# EAGLE board Dynamatic NO 15 -530 - 2 (EAGLE 6.1)
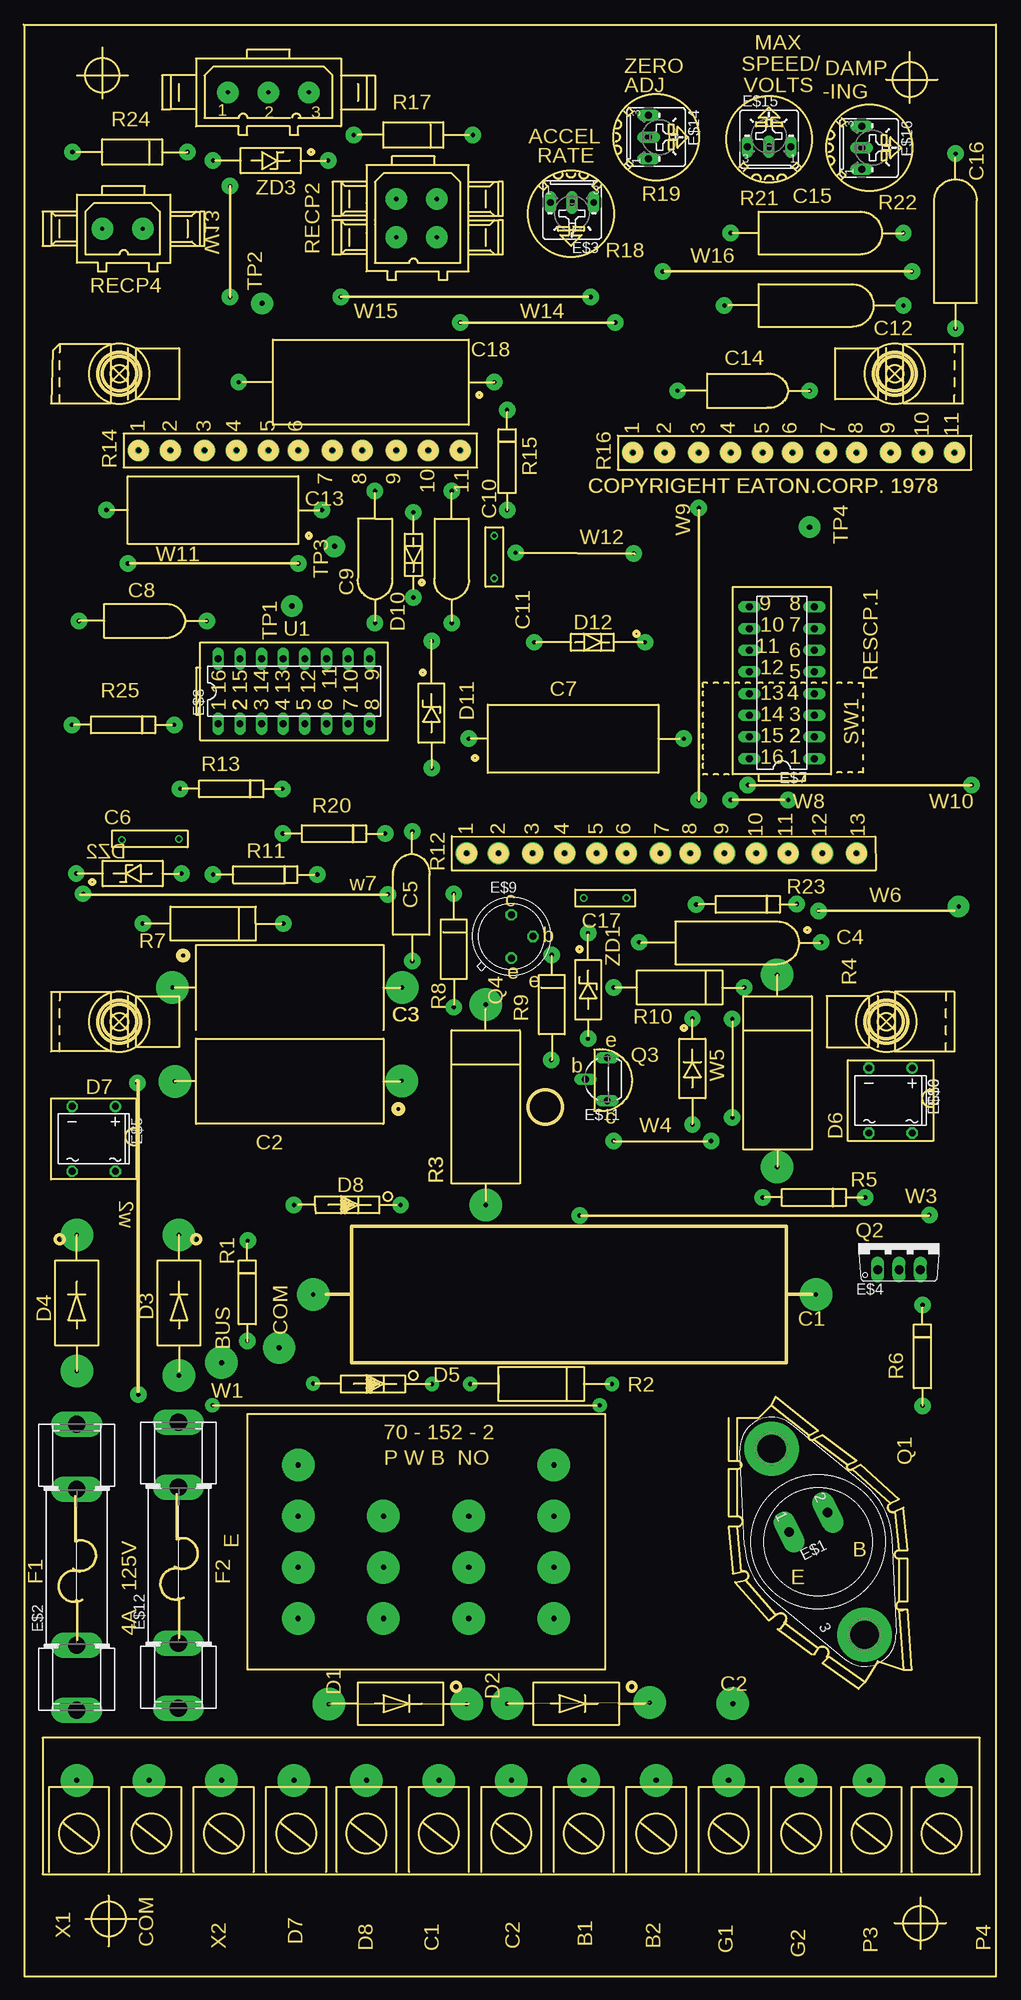
[diagram p0: board, top side]
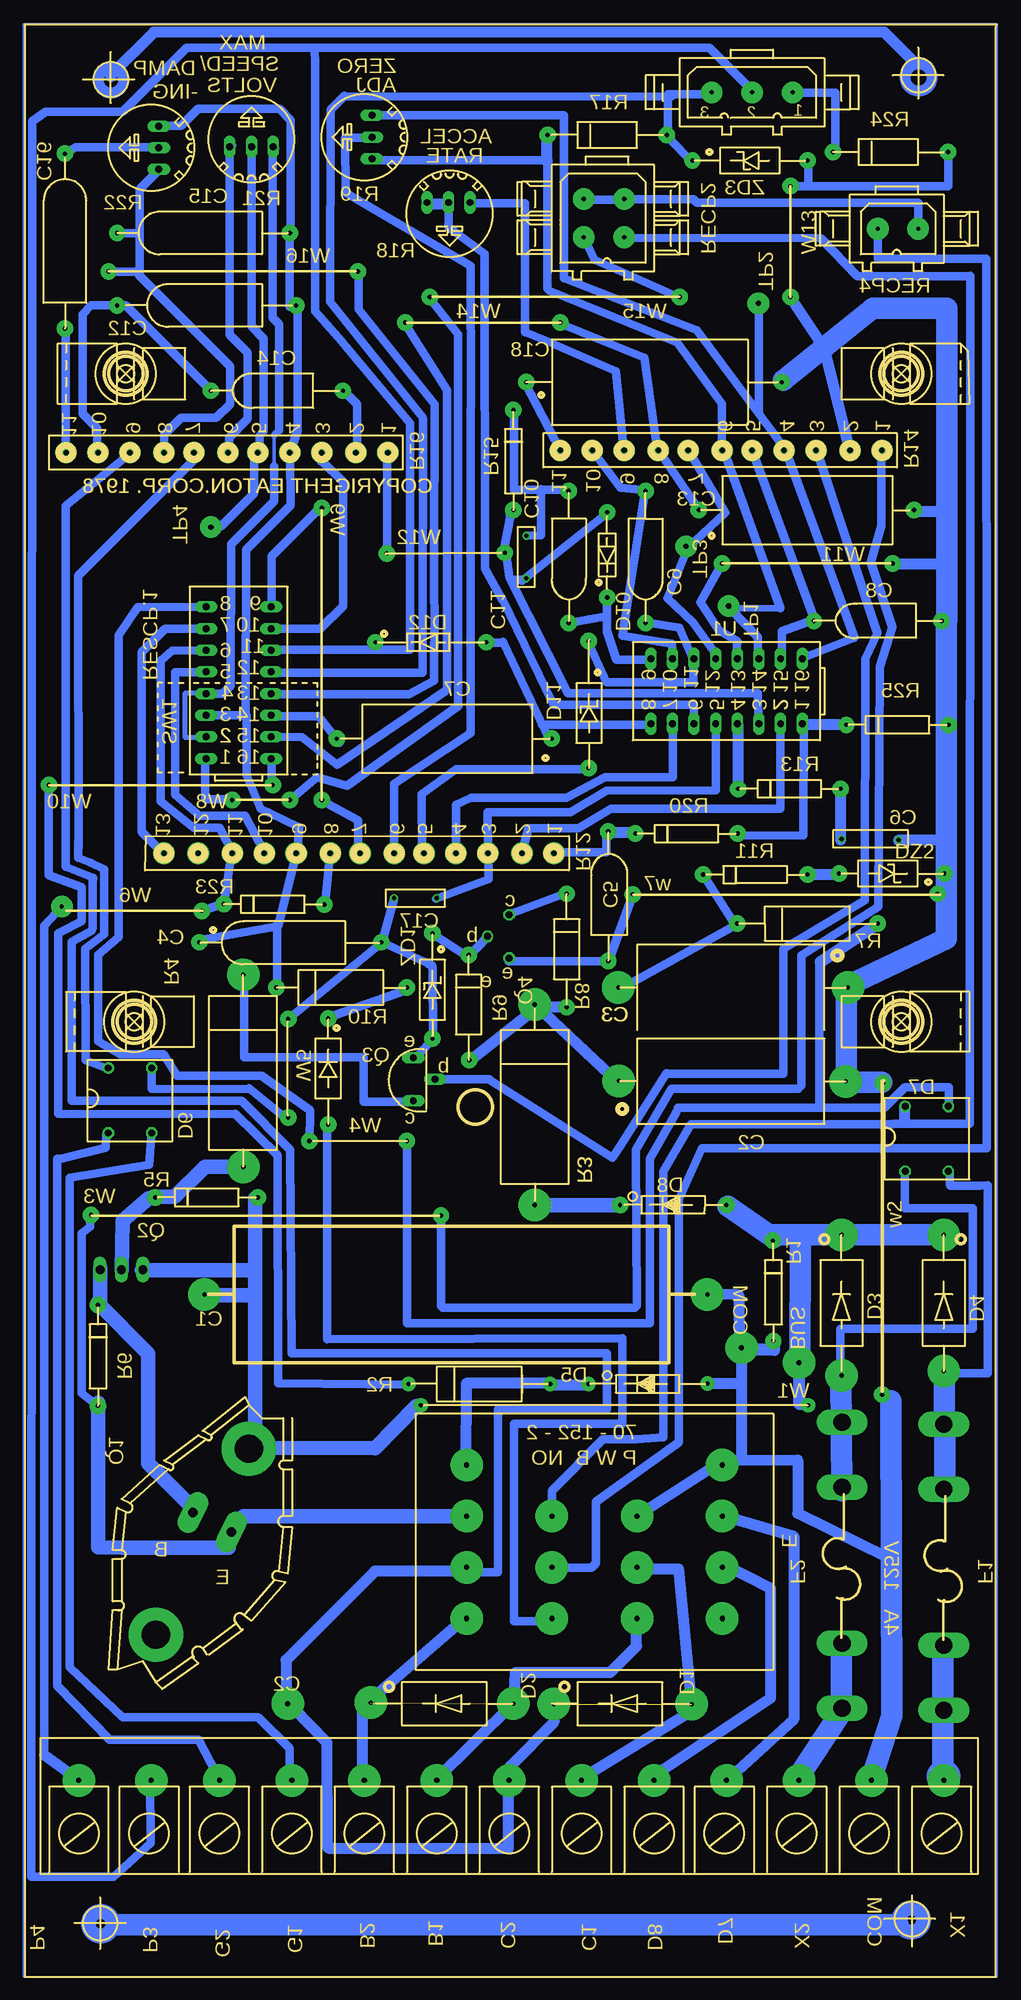
[diagram p1: board, bottom side, seen from below]

Size 114.12 x 228.94 mm. Coordinates in mm from the lower left corner, seen from the top.
Outline: 1178 segments
Outline: circle at 6.5,16.75 radius 2.3
Outline: circle at 15,16.75 radius 2.3
Outline: circle at 23.5,16.75 radius 2.3
Outline: circle at 32,16.75 radius 2.3
Outline: circle at 40.25,16.75 radius 2.3
Outline: circle at 48.75,16.75 radius 2.3
Outline: circle at 57.25,16.75 radius 2.3
Outline: circle at 65.75,16.75 radius 2.3
Outline: circle at 74.25,16.75 radius 2.3
Outline: circle at 82.75,16.75 radius 2.3
Outline: circle at 91.25,16.75 radius 2.3
Outline: circle at 99.5,16.75 radius 2.3
Outline: circle at 107.75,16.75 radius 2.3
Outline: circle at 10,6.75 radius 2
Outline: circle at 105.25,6.25 radius 2
Outline: circle at 104,222.5 radius 2
Outline: circle at 9.25,223 radius 2
Outline: circle at 11.25,188 radius 2
Outline: circle at 102.25,188 radius 2
Outline: circle at 101.25,112 radius 2
Copper layers (1*16): Top 0.035mm / dielectric 1.5mm / Bottom 0.035mm
Design rules: minimum track width 10mil, minimum drill 24mil, track to track 8mil, track to pad 8mil, pad to pad 8mil, via to via 8mil, smd to smd 8mil, copper to edge 40mil, drill to drill 8mil, minimum pad ring 10mil, minimum via ring 8mil, stop-mask expansion 4mil, vias tented up to drill 0mil, thermal gap 10mil

## Footprints (pad centres in the part's own frame; a part is rotated, then mirrored left to right if it is on the bottom)
TO66 = drill 1.118 pad 2.54 long: 1 -2.54,-2.54; 2 -2.54,2.54 | drill 3.302 pad 6.35: 3 12.192,0; TO66 -12.192,0
SH32 = drill 2.007 long: 1A -16.764,0; 1B -9.144,0; 2A 9.144,0; 2B 16.764,0
B25U = drill 0.813 long: A 2.54,-0.889; E -2.54,-0.889; S 0,-0.889
T-30_V = drill 1.016 long: 1 -2.5,-3.1; 2 0,-3.1; 3 2.5,-3.1
DB = drill 0.813: + -2.54,-3.81 | drill 0.813 octagon: - 2.54,-3.81; AC1 2.54,3.81; AC2 -2.54,3.81
DIL16 = drill 0.813 long: 1 -8.89,-3.81; 2 -6.35,-3.81; 3 -3.81,-3.81; 4 -1.27,-3.81; 5 1.27,-3.81; 6 3.81,-3.81; 7 6.35,-3.81; 8 8.89,-3.81; 9 8.89,3.81; 10 6.35,3.81; 11 3.81,3.81; 12 1.27,3.81; 13 -1.27,3.81; 14 -3.81,3.81; 15 -6.35,3.81; 16 -8.89,3.81
TO5 = drill 0.813 octagon: 1 0,-2.54; 2 2.54,0; 3 0,2.54
TO92L = drill 0.813 long: 1 0,-2.54; 2 2.54,0; 3 0,2.54

## Placement (x,y rotation side)
E$1  [TO66]  93.25,51 296.6 top
E$2  [SH32]  6.25,48 90 top
E$3  [B25U]  64.38,207.19 180 top
E$4  [T-30_V]  102.75,86 0 top
E$5  [DB]  8.25,98.25 180 top
E$6  [DB]  101.75,102.75 180 top
E$7  [DIL16]  89,151.75 90 top
E$8  [DIL16]  31.75,150.75 0 top
E$9  [TO5]  57.25,122 0 top
E$10  [DB]  101.75,102.75 180 top
E$11  [TO92L]  68.5,105.25 180 top
E$12  [SH32]  18.19,48.25 90 top
E$14  [B25U]  74.25,215.75 270 top
E$15  [B25U]  87.5,215.5 0 top
E$16  [B25U]  99.25,214.5 270 top

## Library data of the parts
E$1 = transistor-fet
E$2 E$12 = fuse
E$3 E$14-E$16 = pot
E$4 E$9 E$11 = transistor
E$5 E$6 E$10 = rectifier
E$7 E$8 = 45xx

## Tracks (layer width: path | path; a pad name or v marks a point on that pad's centre or on a via)
S$1
  Bottom 0.254: 0,0 0,229 114.25,229 114.25,0 0,0
S$2  (via drill 0.6 pad 3.81)
  other vias: 62.25,54
S$3  (via drill 0.6 pad 3.81)
  other vias: 23.25,23
S$4  (via drill 0.6 pad 3.81)
  other vias: 14.75,23
S$5  (via drill 0.6 pad 3.81)
  other vias: 31.75,23
S$6  (via drill 0.6 pad 3.81)
  other vias: 40.25,23
S$7  (via drill 0.6 pad 3.81)
  other vias: 48.75,23
S$8  (via drill 0.6 pad 3.81)
  other vias: 57.25,23
S$9  (via drill 0.6 pad 3.81)
  other vias: 65.75,23
S$10  (via drill 0.6 pad 3.81)
  other vias: 74.25,23
S$11  (via drill 0.6 pad 3.81)
  other vias: 82.75,23
S$12  (via drill 0.6 pad 3.81)
  other vias: 91.25,23
S$13  (via drill 0.6 pad 3.81)
  other vias: 99.25,23
S$14  (via drill 0.6 pad 3.81)
  other vias: 107.75,23
S$15  (via drill 0.6 pad 3.81)
  other vias: 83.25,32
S$16  (via drill 0.6 pad 2.54)
  other vias: 52,131.75
S$17  (via drill 0.6 pad 3.81)
  other vias: 23.25,72
S$18  (via drill 0.6 pad 2.54)
  other vias: 92.25,170
S$19  (via drill 0.6 pad 2.54)
  other vias: 13.5,179
S$20  (via drill 0.6 pad 2.54)
  Bottom 1.27: v17.25,179 20.25,191
S$21  (via drill 0.6 pad 2.54)
  other vias: 21.25,179
S$22  (via drill 0.6 pad 2.54)
  other vias: 25,179
S$23  (via drill 0.6 pad 2.54)
  other vias: 28.75,179
S$24  (via drill 0.6 pad 2.54)
  other vias: 32.25,179
S$25  (via drill 0.6 pad 2.54)
  other vias: 36.25,179
S$26  (via drill 0.6 pad 2.54)
  other vias: 39.75,179
S$27  (via drill 0.6 pad 2.54)
  other vias: 43.75,179
S$28  (via drill 0.6 pad 2.54)
  other vias: 47.5,179
S$29  (via drill 0.6 pad 2.54)
  other vias: 51.25,179
S$30  (via drill 0.6 pad 2.54)
  other vias: 71.5,178.75
S$31  (via drill 0.6 pad 2.54)
  other vias: 75.25,178.75
S$32  (via drill 0.6 pad 2.54)
  other vias: 79.25,178.75
S$33  (via drill 0.6 pad 2.54)
  other vias: 83,178.75
S$34  (via drill 0.6 pad 2.54)
  other vias: 86.75,178.75
S$35  (via drill 0.6 pad 2.54)
  other vias: 90.25,178.75
S$36  (via drill 0.6 pad 2.54)
  Bottom 1.016: v94.25,178.75 94.25,177.88 107.81,164.31 107.75,132.38
S$37  (via drill 0.6 pad 2.54)
  other vias: 97.75,178.75
S$38  (via drill 0.6 pad 2.54)
  other vias: 101.75,178.75
S$39  (via drill 0.6 pad 2.54)
  other vias: 105.5,178.75
S$40  (via drill 0.6 pad 2.54)
  other vias: 109.25,178.75
S$41  (via drill 0.6 pad 2.54)
  other vias: 36.5,167.75
S$42  (via drill 0.6 pad 3.81)
  other vias: 6.25,23
S$43  (via drill 0.6 pad 3.81)
  other vias: 32.25,54
S$44  (via drill 0.6 pad 3.81)
  other vias: 42.25,42
S$45  (via drill 0.6 pad 3.81)
  other vias: 52.25,42
S$46  (via drill 0.6 pad 3.81)
  other vias: 62.25,42
S$47  (via drill 0.6 pad 3.81)
  other vias: 62.25,48
S$48  (via drill 0.6 pad 3.81)
  other vias: 62.25,60
S$49  (via drill 0.6 pad 3.81)
  other vias: 52.25,54
S$50  (via drill 0.6 pad 3.81)
  other vias: 52.25,48
S$51  (via drill 0.6 pad 3.81)
  other vias: 42.25,54
S$52  (via drill 0.6 pad 3.81)
  other vias: 42.25,48
S$53  (via drill 0.6 pad 3.81)
  other vias: 32.25,42
S$54  (via drill 0.6 pad 3.81)
  other vias: 32.25,48
S$55  (via drill 0.6 pad 3.81)
  other vias: 32.25,60
S$56  (via drill 0.6 pad 2.54)
  other vias: 55.75,131.75
S$57  (via drill 0.6 pad 2.54)
  other vias: 59.75,131.75
S$58  (via drill 0.6 pad 2.54)
  other vias: 31.5,160.75
S$59  (via drill 0.6 pad 2.54)
  other vias: 63.5,131.75
S$60  (via drill 0.6 pad 2.54)
  other vias: 67.25,131.75
S$61  (via drill 0.6 pad 2.54)
  other vias: 70.75,131.75
S$62  (via drill 0.6 pad 2.54)
  other vias: 74.75,131.75
S$63  (via drill 0.6 pad 2.54)
  Bottom 1.016: v78.25,131.75 78.94,125.25
S$64  (via drill 0.6 pad 2.54)
  other vias: 82.25,131.75
S$65  (via drill 0.6 pad 2.54)
  other vias: 86,131.75
S$66  (via drill 0.6 pad 2.54)
  other vias: 89.75,131.75
S$67  (via drill 0.6 pad 2.54)
  other vias: 93.75,131.75
S$68  (via drill 0.6 pad 2.54)
  other vias: 97.75,131.75
S$69  (via drill 0.5 pad 2.54)
  Bottom 1.016: v109.75,125.5 111.81,123.25 111.81,26
  Bottom 1.27: 111.81,26 108,23.25 108,22.75
S$70
  Bottom 1.27: 9.75,224.56 13.25,228.06 98.94,228.06 104,223 104,222.88
S$71  (via drill 0.5)
  other vias: 65.75,126.5
S$72  (via drill 0.5)
  other vias: 70.75,126.5
S$73  (via drill 0.6 pad 3.81)
  other vias: 30,73.75
S$74  (via drill 0.5)
  other vias: 55.25,164
S$75  (via drill 0.5)
  other vias: 11.56,133.31
S$76  (via drill 0.5)
  other vias: 18.25,133.44
S$77  (via drill 0.5)
  other vias: 55.25,169
S$78
  Bottom 1.016: 107.37,218.75 111.62,218.75 113.25,217.62 113.31,15.31 113.31,11.69 103.69,11.69 99.31,15.62 99.37,23.5
S$79
  Bottom 1.016: 109.37,213.88 108.12,214.56 97.81,214.56
S$80
  Bottom 1.016: 98.31,211.94 100.56,209.69
S$81  (via drill 0.5 pad 2.54)
  other vias: 24,221
S$82  (via drill 0.5 pad 2.54)
  other vias: 28.75,221
S$83  (via drill 0.5 pad 2.54)
  other vias: 33.5,221
S$84  (via drill 0.5 pad 2.54)
  other vias: 9.25,205
S$85  (via drill 0.5 pad 2.54)
  other vias: 14,205
S$86
  Bottom 1.016: 103.44,204.5 100.62,204.5
S$87
  Bottom 1.016: 104.44,199.94 100.62,199.94
S$88
  Bottom 1.016: 100.62,200.12 100.62,209.5
S$89
  Bottom 1.016: 109.31,178.75 109.31,193.19
S$90
  Bottom 1.016: 92.31,186.06 102.25,196 106.31,196 107.31,195 107.31,183.31 105.62,181.62 105.62,178.19
S$91
  Bottom 1.016: 100.75,199.62 90,188.88 90,184.44 91.62,182.81 95.75,182.81 97.75,180.81 97.75,178.69
S$92
  Bottom 1.016: 3.12,199.5 3.19,100 12.19,100 12.25,99.94 35.94,99.94 39.12,94.44 39.12,63.25 42.25,63 46.25,63 52.25,57 52.25,54.06 52.19,54
S$93  (via drill 0.5 pad 2.54)
  other vias: 48.5,204
S$94  (via drill 0.5 pad 2.54)
  other vias: 43.75,208.5
S$95  (via drill 0.5 pad 2.54)
  other vias: 48.5,208.5
S$96  (via drill 0.5 pad 1.68)
  other vias: 52.44,69.5
S$97  (via drill 0.5 pad 1.68)
  other vias: 47.94,69.5
S$98  (via drill 0.5 pad 1.68)
  other vias: 22.19,67
S$99  (via drill 0.5 pad 1.68)
  other vias: 69.06,69.5
S$100  (via drill 0.5 pad 3.81)  (1 unrouted)
  other vias: 52,31.94 35.81,31.94
S$101  (via drill 0.5 pad 3.81)  (1 unrouted)
  other vias: 73.5,32.12 56.75,32
S$102  (via drill 0.5 pad 3.81)
  other vias: 6.25,87
S$103  (via drill 0.5 pad 3.81)
  other vias: 6.25,71
S$104  (via drill 0.5 pad 1.93)
  other vias: 31.75,90.5
S$105  (via drill 0.5 pad 1.93)
  other vias: 44.25,90.5
S$106  (via drill 0.5 pad 3.81)
  other vias: 54.25,90.5
S$107  (via drill 0.5 pad 1.93)
  other vias: 65.25,89.25
S$108  (via drill 0.5 pad 1.93)
  other vias: 106.31,89.31
S$109  (via drill 0.5 pad 3.81)
  other vias: 93,80
S$110  (via drill 0.5 pad 3.81)
  other vias: 34,80
S$111  (via drill 0.5 pad 1.93)
  other vias: 26.31,86.31
S$112  (via drill 0.5 pad 1.93)
  other vias: 26.25,74.56
S$113  (via drill 0.5 pad 1.93)
  other vias: 105.5,78.75
S$114  (via drill 0.5 pad 1.93)
  other vias: 105.5,66.94
S$115  (via drill 0.5 pad 1.93)
  other vias: 98.75,91.38
S$116  (via drill 0.5 pad 1.93)
  other vias: 86.75,91.38
S$117  (via drill 0.5 pad 3.81)
  other vias: 88.44,94.94
S$118  (via drill 0.5 pad 1.93)
  other vias: 78.5,99.94
S$119  (via drill 0.5 pad 1.93)
  other vias: 80.69,98
S$120  (via drill 0.5 pad 1.93)
  Bottom 1.016: v69.25,98 69.25,76.62 40.75,76.62 40.75,95.94 37.62,101.38 37.69,101.38
S$121  (via drill 0.5 pad 1.93)
  other vias: 83.19,112.31
S$122  (via drill 0.5 pad 1.93, 0.5 pad 3.81)
  other vias: 44.38,105.06 13.38,104.81 13.5,68.25
S$123  (via drill 0.5 pad 3.81)
  other vias: 44.44,116
S$124  (via drill 0.5 pad 3.81)
  other vias: 17.5,116
S$125  (via drill 0.5 pad 3.81)
  other vias: 17.75,105
S$126  (via drill 0.5 pad 3.81)
  other vias: 54.25,114
S$127  (via drill 0.5 pad 1.93)
  other vias: 50.5,113.69
S$128  (via drill 0.5 pad 1.93)
  other vias: 78.5,112.38
S$129  (via drill 0.5 pad 1.93)
  other vias: 61.94,107.5
S$130  (via drill 0.5 pad 1.93)
  other vias: 62,119.81
S$131
  Bottom 1.016: 70.75,126.44 72.25,121.06
S$132  (via drill 0.5 pad 1.93)
  other vias: 72.25,121.31
S$133  (via drill 0.5 pad 1.93)
  other vias: 69.25,116
S$134  (via drill 0.5 pad 1.93)
  other vias: 84.56,116
S$135  (via drill 0.5 pad 3.81)
  other vias: 88.44,117.5
S$136  (via drill 0.5 pad 1.93)
  other vias: 93.62,121.31
S$137
  Bottom 1.016: 90.06,214.75 90.06,192.56 87.94,190.44 87.94,182.69 90.12,180.5 90.12,178.44
  Bottom 1.27: 89.94,214.75 90.06,214.75
S$138  (via drill 0.5 pad 1.93)
  other vias: 93.31,125
S$139  (via drill 0.5 pad 1.93)
  other vias: 90.75,125.81
S$140  (via drill 0.5 pad 1.93)
  other vias: 78.94,125.75
S$141  (via drill 0.5 pad 1.93)
  other vias: 45.62,119.12
S$142  (via drill 0.5 pad 1.93)
  other vias: 30.5,123.5 42.75,126.94 7,127
S$143  (via drill 0.5 pad 1.93)
  other vias: 14,123.5
S$144  (via drill 0.5 pad 1.93)
  other vias: 50.5,127
S$145  (via drill 0.5 pad 1.93)
  other vias: 45.62,134.31
S$146  (via drill 0.5 pad 1.93)
  other vias: 47.94,141.75
S$147  (via drill 0.5 pad 1.93)
  other vias: 52.25,145.19
S$148  (via drill 0.5 pad 1.93)
  other vias: 77.5,145.19
S$149  (via drill 0.5 pad 1.93)
  other vias: 79.25,138
S$150  (via drill 0.5 pad 1.93)
  other vias: 83,138
S$151  (via drill 0.5 pad 1.93)
  other vias: 89.75,138
S$152  (via drill 0.5 pad 1.93)
  other vias: 85,139.75
S$153  (via drill 0.5 pad 1.93)
  other vias: 111.25,139.75
S$154  (via drill 0.5 pad 1.93)
  other vias: 79.25,172.25
S$155  (via drill 0.5 pad 1.93)
  other vias: 47.94,156.62
S$156  (via drill 0.5 pad 1.93)
  other vias: 17.69,146.81
S$157  (via drill 0.5 pad 1.93)
  other vias: 42.44,134.06
S$158  (via drill 0.5 pad 1.93)
  other vias: 21.5,159
S$159  (via drill 0.5 pad 1.93)
  other vias: 6.5,159
S$160  (via drill 0.5 pad 1.93)
  other vias: 41.25,158.75
S$161  (via drill 0.5 pad 1.93)
  other vias: 72.94,156.5
S$162  (via drill 0.5 pad 1.93)
  other vias: 76.75,186
S$163  (via drill 0.5 pad 1.93)
  other vias: 92.25,186
S$164  (via drill 0.5 pad 1.93)
  other vias: 103.25,196
S$165  (via drill 0.5 pad 1.93)
  other vias: 82.25,196
S$166  (via drill 0.5 pad 1.93)
  other vias: 83,204.5
S$167  (via drill 0.5 pad 1.93)
  other vias: 103.25,204.5
S$168  (via drill 0.5 pad 1.93)
  other vias: 109.38,193.31
S$169  (via drill 0.5 pad 1.93)
  other vias: 109.38,213.81
S$170  (via drill 0.5 pad 1.93)
  other vias: 104.25,200
S$171  (via drill 0.5 pad 1.93)
  other vias: 75,200
S$172  (via drill 0.5 pad 1.93)
  other vias: 66.56,197
S$173  (via drill 0.5 pad 1.93)
  other vias: 69.44,194
S$174  (via drill 0.5 pad 1.93)
  other vias: 51.25,194
S$175  (via drill 0.5 pad 1.93)
  other vias: 37.25,197
S$176  (via drill 0.5 pad 1.93)
  other vias: 55.25,187
S$177  (via drill 0.5 pad 1.93)
  other vias: 56.75,172
S$178  (via drill 0.5 pad 1.93)
  other vias: 25.25,187 9.75,172 35,172 32.25,165.75 12.25,165.75
S$179  (via drill 0.5 pad 1.93)
  other vias: 35.75,213
S$180  (via drill 0.5 pad 1.93)
  other vias: 22.25,213 24.25,197 24.25,210
S$181  (via drill 0.5 pad 1.93)
  other vias: 19.25,214
S$182  (via drill 0.5 pad 1.93)
  other vias: 5.75,214
S$183  (via drill 0.5 pad 1.93)
  other vias: 52.75,216
S$184  (via drill 0.5 pad 1.93)
  other vias: 38.75,216
S$185
  Bottom 1.016: 87.5,214.62 87.5,193.56 86.06,192.12 86.06,181.25 86.56,180.75 86.56,178.75
  Bottom 1.27: 87.44,214.69 87.5,214.62
S$186
  Bottom 0.406: 84.81,180.81 84.81,177.12 | 84.81,173.12 84.81,173.06
  Bottom 0.813: 84.25,181.38 84.81,180.81
  Bottom 1.016: 85,214.31 85,194.56 84.25,193.81 84.25,181.38 | 84.81,173.06 89.81,168.06 | 84.81,173.12 84.81,177.12
  Bottom 1.27: 84.87,214.44 85,214.31
S$187
  Bottom 0.813: 92.87,150.38 92.81,150.44 | 89.5,168.38 89.87,168
  Bottom 1.016: 92.81,150.44 90.87,150.44 89.94,151.38 89.87,168
S$188
  Bottom 1.016: 87.19,178.56 87.19,174 91.06,170.12 92.69,170.12
  Bottom 1.27: 86.81,178.94 87.19,178.56 | 92.69,170.12 92.69,170
S$189
  Bottom 1.016: 98.31,217.06 95.75,217.06 93.75,219.06 84.19,219.06 82.87,217.75 82.87,204.38
  Bottom 1.27: 98.37,217 98.31,217.06
S$190
  Bottom 1.016: 19,213.94 19,220.94 23.94,220.94
S$191
  Bottom 1.016: 24.19,210 5.75,210 5.75,214.25
S$192
  Bottom 1.016: 22.12,213.06 22.12,210.06
  Bottom 1.27: 22.19,213.06 22.12,213.06
S$193
  Bottom 1.016: 9.25,204.88 9.25,208.06 35.25,208.06 35.62,208.44 43.75,208.44 | 43.81,208.38 48.5,208.38
  Bottom 1.27: 43.75,208.44 43.81,208.38
S$194
  Bottom 1.016: 14,204.88 14,201.5 1.25,201.5 1.19,139.62
S$195
  Bottom 1.27: 10.87,102.12 10.87,100.19
S$196
  Bottom 2.54: 17.69,104.88 17.69,116.12 5.94,121.75 5.94,159.5
S$197
  Bottom 2.54: 5.87,159.06 5.87,195.69 14.56,195.69 25.06,187.25
S$198  (via drill 0.5 pad 1.93)
  other vias: 5.69,146.81
S$199  (via drill 0.5 pad 1.93)
  other vias: 71.62,166.94
S$200  (via drill 0.5 pad 1.93)
  other vias: 57.75,167
S$201  (via drill 0.6 pad 2.54)
  other vias: 28,196.25
S$202  (via drill 0.5 pad 1.93)
  other vias: 66.25,110
S$203  (via drill 0.5 pad 1.93)
  other vias: 34.5,129.25
S$204  (via drill 0.5 pad 1.93)
  other vias: 30.38,139.31
S$205  (via drill 0.5 pad 1.93)
  other vias: 30.44,134.06
S$206  (via drill 0.5 pad 1.93)
  other vias: 22.25,129.25
S$207  (via drill 0.5 pad 1.68)
  other vias: 34,69.56
S$208  (via drill 0.5 pad 3.81)
  other vias: 18.25,87
S$209  (via drill 0.5 pad 3.81)
  other vias: 18.25,70.5
S$210
  Bottom 1.27: 9.75,171.88 5.56,171.88
S$211
  Bottom 1.27: 12.25,165.69 5.75,165.69
S$212
  Bottom 1.016: 28.69,221.19 33.75,226.25 95.12,226.25 102.62,218.75 107.06,218.75
S$213
  Bottom 1.016: 48.44,203.88 47.25,201.38 37.19,196.94
S$214
  Bottom 1.27: 24.12,196.75 20.75,191.62
S$215
  Bottom 1.016: 73.31,218.31 50.81,218.31 50.81,199.19 35.25,193.12 24.56,178.75
S$216
  Bottom 1.016: 27.94,195.75 27.94,183.44
S$217
  Bottom 1.016: 33.37,220.75 38.62,220.75 38.62,215.81 35.69,212.69
S$218
  Bottom 1.016: 38.12,220.56 76.56,220.5
S$219
  Bottom 1.016: 73.25,213.06 52.94,213.06 | 52.75,216 52.75,197.94
  Bottom 1.27: 52.94,213.06 52.94,213 52.81,213 52.81,216 52.75,216
S$220
  Bottom 1.016: 32.31,178.94 32.31,184.5 37.5,191.62 52.5,197.75
  Bottom 1.27: 32.25,178.94 32.31,178.94
S$221
  Bottom 1.016: 51.25,193.88 41.37,189.88 39.87,178.94
S$222
  Bottom 1.016: 39.69,178.94 34.87,171.88
S$223
  Bottom 1.016: 55.37,186.94 51.25,178.94
S$224
  Bottom 1.016: 51.87,191.38 44.75,188.31 43.81,178.81
S$225
  Bottom 1.27: 66.81,207.94 64.5,207.94
S$226
  Bottom 1.016: 61.81,208 55.37,208 55.37,192.88
S$227
  Bottom 1.016: 55.31,192.88 52.06,191.5
S$228
  Bottom 1.016: 64.37,207.19 64.37,205.19 60.12,202.06 60.06,165.12 58.06,161.44
S$229
  Bottom 1.016: 73.44,215.69 76.5,215.69 76.44,209.25 65.31,202.69 61.81,200.69 61.75,185.69 61.81,182.38
S$230
  Bottom 1.016: 76.69,186 75.12,184.44 75.12,178.62
S$231
  Bottom 1.016: 76.56,220.62 78.19,218.94 78.25,196.44 67.44,182.88
S$232  (via drill 0.5 pad 1.93)
  other vias: 41.25,174.25
S$233  (via drill 0.5 pad 1.93)
  other vias: 56.75,183.75
S$234  (via drill 0.5 pad 1.93)
  other vias: 50.25,158.75 45.75,161.75 45.75,171.75
S$235  (via drill 0.5 pad 1.68)
  other vias: 67.62,67
S$236
  Bottom 1.016: 79.19,137.94 75,135.62 75,131.31
S$237
  Bottom 1.016: 69.44,193.75 64.56,186.06 64.56,150.94
S$238
  Bottom 1.016: 67.37,182.69 67.44,156.69 67.44,152.94 85.5,152.94
S$239
  Bottom 1.016: 48.06,149.19 35.56,149.19 35.56,146.75
S$240  (via drill 0.5 pad 1.93)
  other vias: 18.38,139.31
S$241  (via drill 0.5 pad 1.93)
  other vias: 50.25,174.25
S$242  (via drill 0.5 pad 1.93)
  other vias: 59.94,156.5
S$243
  Bottom 1.016: 74.94,200 74.94,195.56 66,184.44 66.06,166 66,155.94
S$244
  Bottom 1.016: 66.56,196.81 63.25,192.62 63.25,149.06
S$245
  Bottom 1.016: 71.56,178.62 71.56,167
S$246
  Bottom 1.016: 21.44,159.19 28.81,179.25
S$247
  Bottom 1.016: 58,156.56 52.5,145.06
S$248
  Bottom 1.016: 40.69,146.81 53.37,146.81
S$249
  Bottom 1.016: 48.12,141.62 63.5,141.62 67.56,138.69 67.5,131.5
S$250
  Bottom 1.016: 63.5,131.69 63.5,137.44 61.75,138.25 50.5,138.25
S$251
  Bottom 1.016: 35.62,154.31 35.62,151.81 45.81,151.81 48.12,156.88
S$252
  Bottom 1.016: 44.5,149.19 52.06,149.19 58.06,161.56
S$253
  Bottom 1.016: 28,146.88 28.06,150.5 50.37,150.5
S$254
  Bottom 1.016: 47.69,150.5 50.37,150.5 57.19,164.06 57.62,166.94
S$255
  Bottom 1.016: 55.69,163.81 56.75,163.81
S$256
  Bottom 1.016: 70.75,131.81 70.75,139.88 61.81,145.81 61.81,182.69
S$257
  Bottom 1.016: 83.12,137.88 79.81,140.69 76.25,139.69 63.19,149.06
S$258
  Bottom 1.016: 85.12,139.62 85.12,142.88
S$259
  Bottom 1.016: 69,150.38 66.06,152 66.06,156.5
S$260
  Bottom 1.016: 64.75,150.75 77.44,142.12 79.69,143.88 81.56,145.38 85.44,145.44
S$261
  Bottom 1.016: 85.31,147.81 79.62,147.81 77.12,144.69
S$262
  Bottom 1.016: 80.06,225.94 80,224.5 80,195.31 77.25,192.19 68.87,182.19 68.87,155.62 85.37,155.62
S$263
  Bottom 1.016: 59.94,156.44 57.94,156.44
S$264
  Bottom 1.016: 57.94,167.12 57.06,171.62
  Bottom 1.27: 57.06,171.62 56.81,172.06
S$265
  Bottom 1.016: 56.69,183.94 56.69,174.38 50.12,174.38
S$266
  Bottom 1.016: 55.19,169 53.5,169.06 53.5,174.44
S$267
  Bottom 1.016: 45.75,159.56 47.81,159.19 50.31,158.75
S$268
  Bottom 1.016: 45.75,161.69 45.75,158
S$269
  Bottom 1.016: 45.56,171.81 55.75,163.69
  Bottom 1.27: 46.06,171.69 45.56,171.81
S$270
  Bottom 1.016: 41.25,158.88 37.25,158.19 35.75,154.69
S$271
  Bottom 1.016: 47.56,179.06 44.19,174.62 41.25,174.31
S$272
  Bottom 1.016: 40.56,154.44 44.69,154.44 45.75,157.81
S$273
  Bottom 1.016: 38.06,154.69 38.12,156.31 43.94,157.25 41.31,174.12
S$274
  Bottom 0.813: 25.44,160.5 31.31,160.44
  Bottom 1.016: 32.06,178.94 25.44,160.5 | 31.31,160.44 28.06,157.06 28.06,154.12
S$275
  Bottom 1.016: 32.31,165.69 34.81,161.19 32.62,157.94 30.5,156.62 30.62,154.56
S$276
  Bottom 1.016: 36.25,179.12 31.87,171.69 36.25,167.56 38.69,161.69 35.69,158.88 32.81,154.88
S$277
  Bottom 1.016: 25.25,154.31 25.25,157.81 21.69,159.06
S$278
  Bottom 1.016: 24.75,178.81 16.75,157 22.75,154.69
S$279
  Bottom 1.27: 22.56,146.88 18.62,146.88 17.56,146.69
S$280
  Bottom 1.27: 45.75,134.19 42.62,134.19
S$281
  Bottom 1.27: 30.44,146.88 30.44,139.56 30.31,139.5
S$282
  Bottom 1.27: 18.37,139.19 18.37,133.31
S$283
  Bottom 1.27: 18.87,129.25 22,129.25
S$284
  Bottom 1.27: 11.56,133.25 11.5,133.31 6.31,133.31
S$285  (via drill 0.5 pad 1.93)
  other vias: 18.56,129.38
S$286  (via drill 0.5 pad 1.93)
  other vias: 6.19,129.38
S$287
  Bottom 2.54: 103.37,6.06 11.62,6.06 11.62,6.19
S$288
  Bottom 2.54: 6.37,23.5 6.37,38.31
  Bottom 3.81: 6.19,23.5 6.37,23.5
S$289
  Bottom 2.54: 23.5,23.12 18.25,31.06 18.25,38.94
S$290
  Bottom 2.54: 14.75,23.12 12.37,30.56 12.44,67.56
S$291
  Bottom 2.54: 13.5,104.88 17.31,104.88
S$292
  Bottom 1.27: 31.81,22.88 23.81,30.25 23.81,51.56 32.44,54.12
S$293
  Bottom 1.27: 40,23.81 26.56,32.69 26.56,45.5 32.31,48.44
S$294
  Bottom 1.27: 42.44,47.81 37.37,47.81 35.81,31.19 48.94,23.12
S$295
  Bottom 1.27: 42.31,54 32.06,60.62 23.37,60.56 23.37,54.31 12.87,49.19
S$296
  Bottom 1.27: 30,73.56 30,60.62
S$297
  Bottom 1.27: 35.37,80.06 30.62,80 30.31,79.94 30.25,73.75
S$298
  Bottom 1.27: 33.87,69.56 30.25,69.56 30.25,69.62
S$299
  Bottom 1.27: 52.5,69.44 47.75,69.44
S$300
  Bottom 1.27: 52.62,69.56 62.31,69.56 62.37,59.75
S$301
  Bottom 1.676: 89.81,52.62 88.44,54 61.75,54
S$302
  Bottom 1.27: 85.5,61.75 85.25,62
  Bottom 1.676: 85.25,62 73,61.94 68.19,66.88 67.94,66.94
S$303
  Bottom 1.27: 95.94,82.88 100.56,82.88
S$304
  Bottom 1.27: 105.5,78.81 105.25,79.06
  Bottom 1.676: 105.25,79.06 105.25,83.12
S$305
  Bottom 1.27: 94.12,54.69 94.12,54.19
  Bottom 1.676: 105.56,79 99.62,73.06 99.62,60.19 94.12,54.69
S$306
  Bottom 1.27: 90.44,50.75 90.69,50.5 90.69,50.19 90.19,50.31
  Bottom 1.676: 90.19,50.31 102.62,50.31 105.5,50.38 105.5,67.31
S$307
  Bottom 1.27: 51.87,31.94 52,31.81 52,29.81 57.12,24.69 57.12,22.88 57.37,22.62 57.37,15 78.37,15 78.56,15.19 78.62,27.44 82.56,31.44 83.75,31.94
S$308
  Bottom 1.27: 62.19,47.56 73,47.56 83.44,37.12 83.44,31.5
S$309
  Bottom 1.27: 62.31,42.12 74,32.06 74,31.62 74.5,31.25 74.5,22.06
S$310
  Bottom 1.27: 56.69,32 56.5,35.69 45.37,35.69 42.31,38.75 42.31,42.44
S$311
  Bottom 1.016: 83,23 83,26.75 86.69,30.44 102.62,30.44 108.81,36.25 108.81,93.69 99.5,95.19 99.19,99.06
  Bottom 1.27: 82.87,22.88 83,23
S$312
  Bottom 1.016: 104.56,98.88 104.62,97.19 109.81,95.94 110.31,95.94 110.31,34.12 104.12,27.75 93.69,27.75 90.87,22.38
S$313
  Bottom 1.016: 105.44,66.81 107.44,68.44 107.44,87.19 106.44,87.94 106.44,89.12
S$314
  Bottom 1.016: 99.56,91.31 99.12,91.31 99,91.44
  Bottom 1.676: 102.75,82.81 102.62,88.62 99.56,91.31 | 99,91.44 96.5,91.44 92.94,95 88.25,95
S$315
  Bottom 1.27: 87.12,82.81 87.12,80.75
  Bottom 1.676: 99.56,82.81 87.12,82.81
S$316
  Bottom 1.016: 84.87,158.06 79.44,158.06 76.75,160.75 76.75,175.31 79.25,177.81
  Bottom 1.27: 85.06,158.06 84.87,158.06 | 79.25,177.81 79.25,178.69
S$317
  Bottom 1.016: 73,156.81 73,155.81
S$318
  Bottom 1.016: 79.25,172.44 85.12,166.56 85.12,160.62
S$319
  Bottom 1.016: 21.12,178.94 14.06,157.56 15.44,154.56 15.5,126.25 24.94,120.62
S$320
  Bottom 1.016: 13.56,178.62 13.56,170.19 14.81,165.88 12.31,158.25 13.75,153.62 13.94,125.62
S$321
  Bottom 2.54: 6.19,71 6.12,56.81
S$322
  Bottom 2.54: 18.31,70.56 18.19,57
S$323
  Bottom 1.016: 5.25,70.75 1.06,70.75 1.06,92.81 2,92.75 5.5,92.75 5.56,92.88 5.56,94.44
S$324
  Bottom 2.54: 23.06,86.31 23.12,71.88
S$325
  Bottom 2.54: 17.56,87 26.62,87
S$326
  Bottom 1.27: 86.81,91.31 87.06,91.31 | 87.06,64.06 87.12,64.06 87.12,79.94 | 93.37,79.94 93.37,79.81 93.31,79.81
  Bottom 1.676: 87.06,91.31 87.06,64.06 | 87.12,79.94 93.37,79.94
S$327
  Bottom 1.016: 86.62,91.44 86.75,91.31
S$328
  Bottom 1.27: 54.25,90.44 54.25,90.56
  Bottom 1.676: 44.31,90.44 54.25,90.44
S$329
  Bottom 2.54: 26.25,86.62 31.56,90.38
S$330
  Bottom 1.016: 111.31,139.62 111.31,129.19 107.44,127.75 107.44,123.75 110.19,122.38 110.19,101.19 94.5,101.12 89.44,101.19 84.44,96.31 84.37,69.56 68.75,69.44
S$331
  Bottom 1.016: 62.44,47.44 58.56,47.44 58.56,66.56 45.75,66.56 45.75,73.12 82.81,73.12 82.94,97 88.62,102.75 108.56,102.75 108.56,121.38
S$332
  Bottom 1.016: 108.5,121.44 106.25,122.69 106.12,122.94 106.12,128.31 106.06,128.88 109.31,130.19 109.31,172.5 101.56,178.81
S$333
  Bottom 1.016: 52.25,41.69 56.69,41.69 56.69,64.81 43.94,64.81 43.94,74.88 78.62,74.75 78.62,99.62
S$334
  Bottom 0.61: 92.94,145.31 95.25,145.31 95.25,150.56 93.37,150.56 93.37,150.25
S$335
  Bottom 1.016: 99.19,106.38 99.19,104.12 87.62,104.06
S$336  (via drill 0.5 pad 1.93)
  other vias: 83.19,100.75
S$337
  Bottom 1.016: 92.94,142.88 92.94,138.06 90.31,138.06
S$338
  Bottom 1.016: 92.81,147.94 88.06,147.94 88.06,140.88 86.44,137 85.44,136.5 81.87,134.81 82.12,131.62
S$339
  Bottom 1.016: 97.81,131.81 98,131.81
S$340
  Bottom 1.016: 92.81,153 96.44,153 96.44,138.62 93.56,136.12 88.25,136.12 86,131.94
S$341
  Bottom 1.016: 92.87,158.06 97.62,158.06 100.37,155.31 100.37,134.25 97.87,131.75
S$342
  Bottom 1.016: 100.37,146.88 100.37,152.5
S$343
  Bottom 1.016: 85.12,150.38 69,150.38
S$344
  Bottom 1.016: 92.87,155.56 96.81,155.5 98.12,154.31 98.12,137.88 94.25,134.75 91.25,134.75 89.69,131.81
S$345
  Bottom 1.016: 83.31,100.75 83.25,100.5 87.75,104.19
S$346
  Bottom 1.016: 83.06,100.56 83.37,100.56
S$347
  Bottom 1.016: 80.69,97.81 80.62,101.62 86.31,105.62 96.19,105.62 97.81,108.19 102.87,108.19 105.5,109.69 105.5,119.88 103.06,121.88 103.06,157.31 100.87,160.62 92.56,160.69
S$348
  Bottom 1.016: 107.81,133.12 107.81,131.25 106.37,130.62 104.75,129.88 104.75,122.25 107,120.56 106.94,107.5 104.37,106.5
S$349
  Bottom 1.016: 52.19,47.94 47.62,47.94 47.06,48.5 47.06,55.69 37.31,62.69 37.31,91.19 34.62,97.12 12.87,97.12
S$350
  Bottom 2.54: 6.31,87 18.37,87
S$351
  Bottom 1.016: 18.37,70.75 18.37,76 2.87,76 2.87,90.12 10.81,90.12 10.81,94.12
S$352
  Bottom 1.016: 13.25,101.88 10.81,104.31 5.69,104.31 5.69,102.31
S$353
  Bottom 1.422: 13.87,123.56 20.69,119
S$354
  Bottom 1.016: 37.44,101.88 20.87,101.88 | 20.87,101.88 20.81,101.88 | 20.87,118.69 20.87,101.88
S$355
  Bottom 0.813: 65.25,78.62 65.06,78.44 | 42.5,78.44 42.25,78.69 | 23.31,104.12 22.94,104.5
  Bottom 1.016: 65.25,89 65.25,78.62 | 65.06,78.44 42.5,78.44 | 42.25,78.69 42.37,97 38.19,104.12 23.31,104.12 | 22.94,104.5 22.94,119.81
S$356
  Bottom 1.016: 13.94,125.5 22.87,119.88
S$357
  Bottom 1.016: 13.44,101.88 21.5,101.88
S$358
  Bottom 0.813: 24.87,120.69 25.06,120.56 | 38.81,105.88 38.81,105.94
  Bottom 1.016: 25.06,120.56 25.06,105.88 38.81,105.88 | 38.81,105.94 44.19,97.44 45.12,96.06 59.69,105.25
S$359
  Bottom 1.016: 59.56,105.25 65.37,105.25
S$360
  Bottom 1.27: 54.12,113.94 44.5,104.88
S$361
  Bottom 1.016: 44.37,115.75 30.69,123.31 34.37,129.12
S$362
  Bottom 1.27: 50.37,113.69 53.94,113.69 62.06,107.25
S$363
  Bottom 1.016: 69.19,115.75 78.94,112.31
S$364
  Bottom 1.016: 68.62,102.94 68.62,102.62 74.31,102.62 74.31,107.81 88.37,107.81 88.37,117.56
S$365
  Bottom 1.016: 51.81,131.88 45.81,131.88 45.81,134.19
S$366
  Bottom 1.016: 30.25,133.81 22.75,133.88 22.69,147.31 22.81,147.31
S$367
  Bottom 1.016: 55.81,131.62 55,134.69 49.12,134.69 45.31,137 25.44,137 25.44,147.12
S$368
  Bottom 1.016: 33,146.88 33,139.12 45.81,139.06 50.06,136.56 59.81,136.56 59.75,131.5
S$370
  Bottom 1.016: 50.5,138.25 46,140.69 38.62,140.69
S$371
  Bottom 1.016: 38.06,146.88 38.06,140.69 39,140.69
S$372
  Bottom 1.016: 45.62,119 42.62,127.25
S$373
  Bottom 1.016: 57.37,124.56 50.31,127.19
S$374  (via drill 0.5 pad 1.93)
  Bottom 1.016: 62,119.56 66.25,122.31 v66.25,122.38
S$375
  Bottom 1.016: 59.75,122 62.19,119.44 62.06,120.19
S$376
  Bottom 1.016: 93.37,124.94 90.87,125.81 90.87,125.88
S$377
  Bottom 1.016: 84.5,115.75 84.5,123.38
S$378
  Bottom 1.016: 93.69,121.56 84.37,123.19 82.44,130.88
S$379
  Bottom 1.016: 59.69,131.75 59.69,128.69 65.81,126.44
S$380
  Bottom 1.016: 68.37,107.56 66.19,110 66.25,118.44
S$381
  Bottom 1.016: 66.62,118.75 66.69,118.75
S$382
  Bottom 1.016: 66.31,118.62 72.19,121.31
S$383
  Bottom 1.016: 83.12,112.31 72,121.44
S$384
  Bottom 1.422: 22.5,67.12 23.19,67.12 23.19,72.06
S$385
  Bottom 1.422: 26.19,74.56 26.19,73.5 30.19,73.5
S$386
  Bottom 1.016: 89.81,131.88 90.75,125.44
S$387
  Bottom 1.016: 88.19,147.62 88.12,167.38 82.87,172.56 82.94,178.62
S$388
  Bottom 1.016: 43.87,204.12 43.87,203.94 20.69,203.88 16.37,199.44 3.37,199.44
S$389  (via drill 0.5 pad 2.54)
  Bottom 1.27: v43.75,204 43.75,203.81
S$390
  Bottom 1.016: 1.19,139.69 1.19,97.12 13.69,97.12
S$391
  Bottom 1.016: 83,204.25 83,195.88 82.06,195.88 82.06,181.38 83,178.62
S$392
  Bottom 1.27: 65.87,23 56.75,32.06 56.75,31.94
S$393
  Bottom 1.016: 57.31,119.38 57.31,119.06 45.56,119.06
(copper drawn outside any net)
  shapes: Bottom circle x4

## Text on the board
Dimension: MAX | SPEED/ | ZERO | DAMP | ADJ | VOLTS | -ING | R17 | 1 | 2 | 3 | R24 | ACCEL | RATE | C16 | ZD3 | R19 | R21 | C15 | R22 | W13 | RECP2 | R18 | W16 | RECP4 | TP2 | W15 | W14 | C12 | C18 | C14 | 1 | 2 | 3 | 4 | 5 | 6 | 1 | 2 | 3 | 4 | 5 | 6 | 7 | 8 | 9 | 10 | 11 | R14 | R16 | R15 | 7 | 8 | 9 | 10 | 11 | COPYRIGEHT EATON.CORP. 1978 | COPYRIGEHT EATON.CORP. 1978 | C13 | C10 | W9 | W12 | TP4 | W11 | TP3 | C8 | C9 | 9 | 8 | 10 | 7 | D10 | C11 | D12 | TP1 | U1 | 11 | 6 | 12 | 5 | 9 | 13 | 4 | RESCP.1 | 16 | 15 | 14 | 13 | 12 | 11 | 10 | R25 | C7 | 1 | 2 | 2 | 2 | 3 | 4 | 5 | 6 | 7 | 8 | 14 | 3 | D11 | 15 | 2 | 2 | 2 | SW1 | 16 | 1 | R13 | R20 | W8 | W10 | C6 | 1 | 2 | 3 | 4 | 5 | 6 | 7 | 8 | 9 | 10 | 11 | 12 | 13 | DZ2 | R11 | R12 | w7 | R23 | c | W6 | C5 | C17 | R7 | b | C4 | ZD1 | e | e | R4 | R8 | Q4 | C3 | C3 | C3 | C3 | R9 | R10 | e | Q3 | b | W5 | D7 | c | W4 | D6 | C2 | R3 | R3 | R5 | D8 | W3 | w2 | Q2 | R1 | D4 | D3 | C1 | COM | BUS | D5 | R2 | R6 | W1 | 70 - 152 - 2 | P W B NO | Q1 | E | B | F1 | F2 | E | 4A 125V | C2 | D1 | D2 | X1 | COM | D7 | B1 | X2 | D8 | C1 | C2 | B2 | G1 | P3 | P4 | G2